# EAGLE board NeopixelPCB (EAGLE 8.6.3)
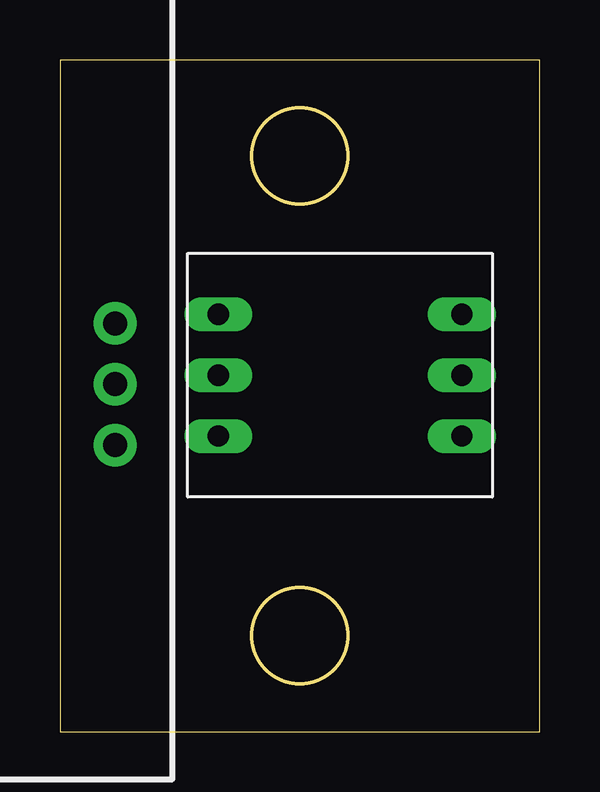
[diagram p0: board, top side]
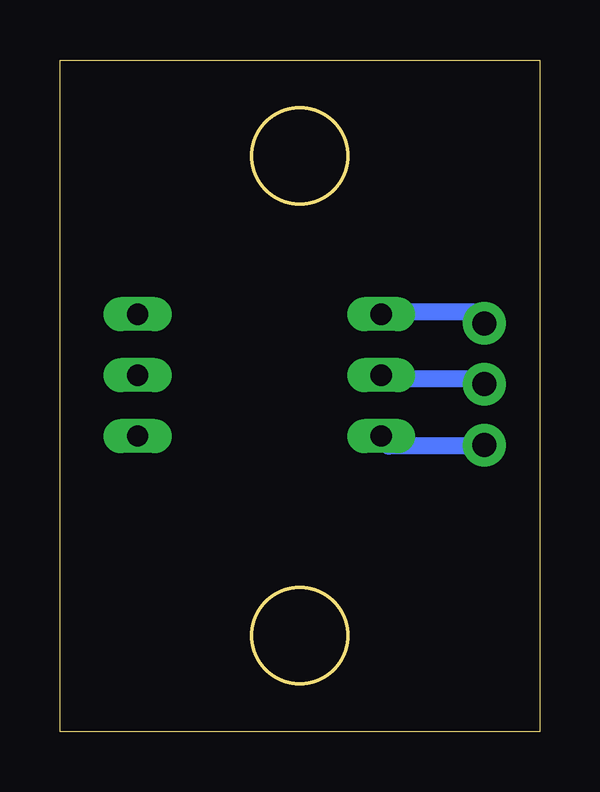
[diagram p1: board, bottom side, seen from below]

Size 20 x 28 mm. Coordinates in mm from the lower left corner, seen from the top.
Outline: 0,0 20,0 20,28 0,28 0,0
Outline: circle at 10,24 radius 2
Outline: circle at 10,4 radius 2
Copper layers (1*16): Top 0.035mm / dielectric 1.5mm / Bottom 0.035mm
Design rules "default *": minimum track width 0.7mm, minimum drill 0.8mm, track to track 0.7mm, track to pad 0.7mm, pad to pad 0.7mm, via to via 0.7mm, smd to smd 0.7mm, copper to edge 40mil, drill to drill 6mil, minimum pad ring 10mil, minimum via ring 8mil, stop-mask expansion 4mil, vias tented up to drill 0mil, thermal gap 10mil

## Footprints (pad centres in the part's own frame; a part is rotated, then mirrored left to right if it is on the bottom)
LCW-103-XX-X-S = drill 1 pad 1.778: 1 2.54,5.415; 2 0,5.415; 3 -2.54,5.415
NEOPIXEL = drill 0.889 pad 1.422 long: + -3.81,2.54; +1 6.35,2.54; G -3.81,0; G1 6.35,0; IN -3.81,-2.54; O 6.35,-2.54

## Placement (x,y rotation side)
P1  LCW-103-XX-X-S  [LCW-103-XX-X-S]  -3.11,14.48 270 top
U$1  NEOPIXEL  [NEOPIXEL]  10.41,14.86 0 top

## Library data of the parts
P1 = altered con-samtec
U$1 = adafruitComponents

## Nets
N$1: P1.3 U$1.+
N$2: P1.2 U$1.G
N$3: P1.1 U$1.IN

## Tracks (layer width: path | path; a pad name or v marks a point on that pad's centre or on a via)
N$1
  Bottom 0.7: U$1.+ 6.3,17.5 2.8,17.5 P1.3
N$2
  Bottom 0.7: U$1.G 6.3,14.7 2.8,14.7 P1.2
N$3
  Bottom 0.7: U$1.IN 6.3,11.9 2.8,11.9 P1.1